# Altium PCB Chess Clock Touch Panel PCB.PcbDoc
Units mm, origin at the board's own origin, x right, y up, seen from the top; angles counter-clockwise.
Board outline 133 x 23 mm, 2 copper layers (Top Layer, Bottom Layer), stack 1.621 mm thick; 6 components, 10 nets, 29 pads, 5 vias.
Unrouted connection lines stored in the file: 10.
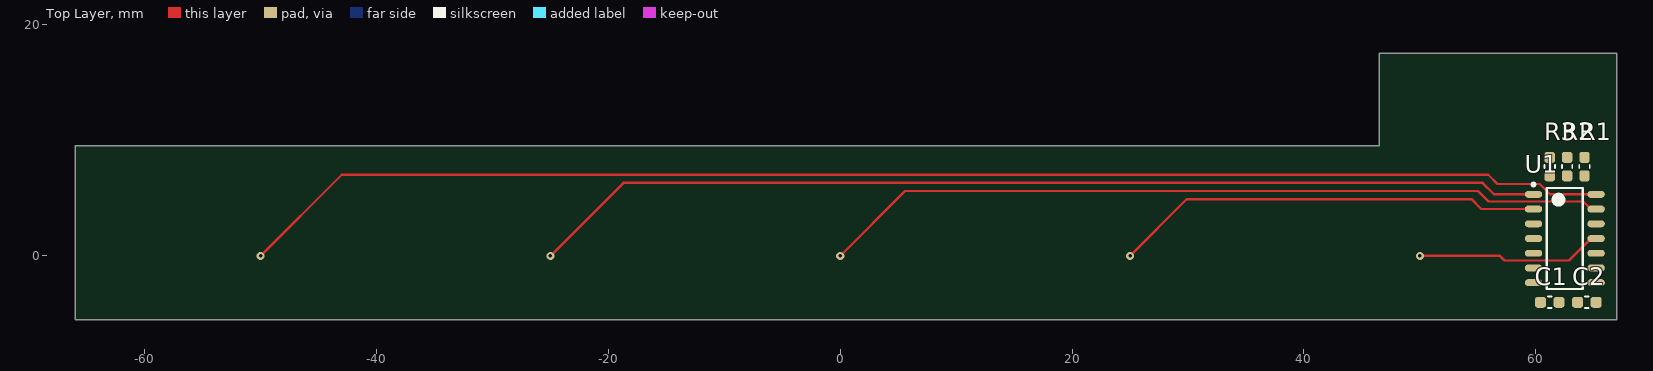
[diagram p0: Top Layer view]
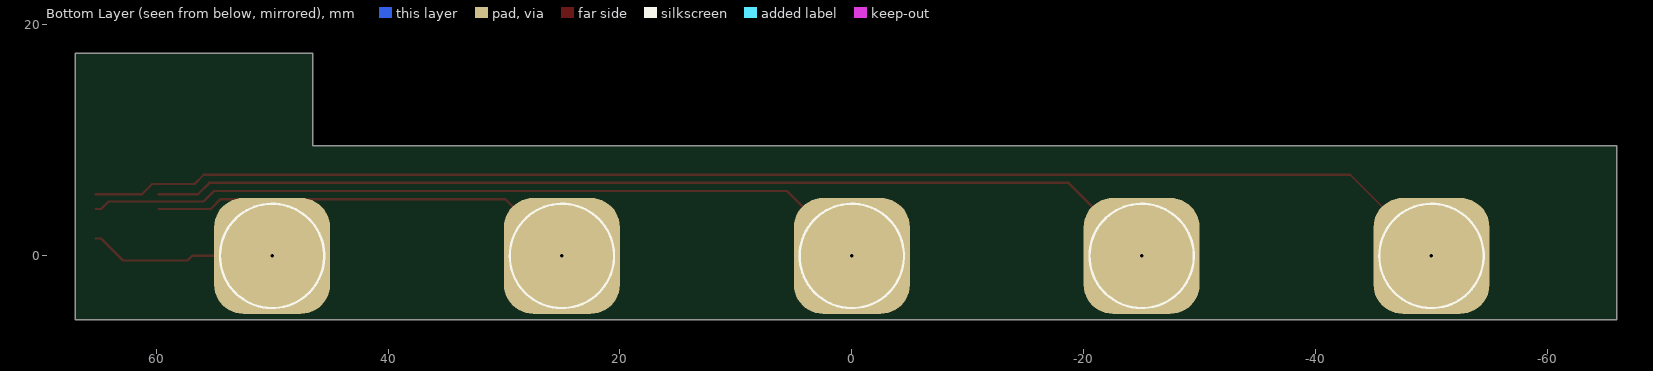
[diagram p1: Bottom Layer view, seen from below]

## Layer stack, top to bottom
Top Solder: solder mask 0.0102, Solder Resist, Dk 3.5
Top Layer: signal copper 0.0356
Dielectric 1: dielectric 1.55, FR-4, Dk 4.8
Bottom Layer: signal copper 0.0356
Bottom Solder: solder mask 0.0102, Solder Resist, Dk 3.5

## Board outline
-66,-5.5 67,-5.5 67,17.5 46.5,17.5 46.5,9.5 -66,9.5

## Design rules (kind name [scope] priority, off if disabled: settings)
BoardOutlineClearance [All] p1: gap=0.4 ignorepadtopadclearanceinfootprint=FALSE
Clearance [All] p1: gap=0.2 ignorepadtopadclearanceinfootprint=FALSE
ComponentClearance [All] p1: gap=0.1 collisioncheckmode=3 verticalgap=0.2 showdistances=TRUE
DiffPairsRouting [All] p1: maxlimit=100 minlimit=0.15 mostfreqgap=0.15 toplayer_minwidth=0.15 toplayer_maxwidth=10 toplayer_prefwidth=0.15 bottomlayer_minwidth=0.15 bottomlayer_maxwidth=10 bottomlayer_prefwidth=0.15 maxuncoupledlength=12.7
Height [All] p1: minheight=0 maxheight=100 prefheight=10
HoleSize [All] p1: absolutevalues=TRUE maxlimit=6.3 minlimit=0.3 maxpercent=80.000 minpercent=20.000
HoleToHoleClearance [All] p1: gap=0.5 allowstackedmicrovias=TRUE
MinimumAnnularRing [All] p1: minimumring=0.15
MinimumSolderMaskSliver [All] p1: minsoldermaskwidth=0.2
PlaneClearance [All] p1: clearance=0.102
PlaneConnect PlaneConnectPowerPads [InPadClass('PowerPads')] p1: planeconnectstyle=Direct reliefexpansion=0.508 reliefentries=4 reliefconductorwidth=0.254 reliefairgap=0.254
PlaneConnect [All] p2: pad.planeconnectstyle=Relief pad.reliefexpansion=0.3 pad.reliefentries=4 pad.reliefconductorwidth=0.102 pad.reliefairgap=0.102 via.planeconnectstyle=Direct via.reliefexpansion=0.3 via.reliefentries=4 via.reliefconductorwidth=0.127 via.reliefairgap=0.127
PolygonConnect PolygonConnectPowerPads [All vs (InPadClass('PowerPads'))] p1: connectstyle=Direct reliefconductorwidth=0.254 reliefentries=4 polygonreliefangle="90 Angle" airgapwidth=0.254
PolygonConnect [All] p2: thpad.connectstyle=Relief thpad.reliefconductorwidth=0.102 thpad.reliefentries=4 thpad.polygonreliefangle="90 Angle" thpad.airgapwidth=0.102 smdpad.connectstyle=Relief smdpad.reliefconductorwidth=0.102 smdpad.reliefentries=4 smdpad.polygonreliefangle="90 Angle" smdpad.airgapwidth=0.102 via.connectstyle=Direct via.reliefconductorwidth=0.127 via.reliefentries=4 via.polygonreliefangle="90 Angle" via.airgapwidth=0.127
RoutingCorners [All] p1: cornerstyle=45-Degree minsetback=2 maxsetback=2
RoutingVias [All] p1: holewidth=0.3 width=0.6 viastyle="Through Hole" minholewidth=0.3 minwidth=0.6 maxholewidth=6.3 maxwidth=10
SilkToSilkClearance [All] p1: silktosilkclearance=0
SilkToSolderMaskClearance [IsPad] p1: minsilkscreentomaskgap=0 clearancetoexposedcopper=TRUE
SolderMaskExpansion [All] p1: expansion=0.05 istentingtop=FALSE
Width [All] p1: maxlimit=50 minlimit=0.15 preferedwidth=0.2 minimp=50.000000 maximp=50.000000 favimp=50.000000
19 further rules are at their usual default settings.

## Components (designator, comment, footprint, x,y, rotation, side; value= is the part's Value field where it differs from the comment)
C1 "Val?" CAPC0603X08N 61.2,-4 r180 top
C2 "Val?" CAPC0603X08N 64.4,-4 r180 top
R1 "Val?" RESC0603X04N 64.2,7.7 r90 top
R2 "Val?" RESC0603X04N 62.7,7.7 r90 top
R3 "Val?" RESC0603X04N 61.2,7.7 r90 top
U1 "CAP1298-1-SL" CAP1298-1-SL 62.5,1.5 r0 top

## Footprints (in the part's own frame and the unit in brackets; to place one, negate y for a bottom-side part, rotate by r counter-clockwise, add the part's x,y. Pads: shape width x height; smd on the part's side, far side on the other; paste and mask are expansions set on the pad)
CAP1298-1-SL [mm] "SOIC, 14-Leads, Body 8.65x3.90mm, Pitch 1.27mm, IPC Medium Density"
  oval 1.5x0.6 smd: 1(-2.7,3.81) 2(-2.7,2.54) 3(-2.7,1.27) 4(-2.7,0) 5(-2.7,-1.27) 6(-2.7,-2.54) 7(-2.7,-3.81) 8(2.7,-3.81) 9(2.7,-2.54) 10(2.7,-1.27) 11(2.7,0) 12(2.7,1.27) 13(2.7,2.54) 14(2.7,3.81)
  silkscreen extent -2.82,-4.35 1.55,4.78, body extent -3,-4.35 3,4.35, height 1.75
CAPC0603X08N [mm] "Chip Capacitor, 2-Leads, Body 1.60x0.80mm, IPC Medium Density"
  rrect50% 0.95x0.95 smd: 1(-0.8,0) 2(0.8,0)
  silkscreen extent -0.15,-0.5 0.15,0.5, body extent -0.8,-0.41 0.8,0.41, height 0.84
RESC0603X04N [mm] "Chip Resistor, 2-Leads, Body 1.60x0.80mm, IPC Medium Density"
  rrect50% 0.95x0.9 smd: 1(-0.8,0) 2(0.8,0)
  silkscreen extent -0.15,-0.45 0.15,0.45, body extent -0.8,-0.4 0.8,0.4, height 0.46

## Part data
C1 C2: library part "GENERIC CAPC 0603", "GENERIC CAPC 0603", Manufacturer=-, Package=0603, Capacitance=Val?, Categories="Ceramic Capacitors", Manufacturer Part Number=-, Supplier 1=Digi-Key, Supplier 2=LCSC, Supplier Part Number 1=-, Supplier Part Number 2=-, Temperature Coefficient=-, Tolerance=-, Voltage - Rated=-
R1 R2 R3: library part "GENERIC RESC 0603", "GENERIC RESC 0603", Manufacturer=-, Package=0603, Categories=Resistors, Manufacturer Part Number=-, Power (Watts)=-, Resistance=Val?, Supplier 1=Digi-Key, Supplier Part Number 1=-, Temperature Coefficient=-, Tolerance=-
U1: "8-CHANNEL CAPACITIVE TOUCH SENSO", Manufacturer="Microchip Technology", Package=14-SOIC, Supplier Part Number 1=CAP1298-1-SL-ND, Categories="Interface ICs", Manufacturer Part Number=CAP1298-1-SL, Supplier 1=Digi-Key, Supplier 2=LCSC, Supplier Part Number 2=C1522287

## Free pads (board coordinates)
  rrect50% 10x10 smd far side: 0(-50,0) 0(-25,0) 0(0,0) 0(25,0) 0(50,0)

## Via types
v1: diameter 0.7, hole 0.3, Top Layer to Bottom Layer, tented both sides, 5 vias

## Nets (pads, with @x,y where several pads share a name; then routed paths per layer and width w, separated by ;. In a path a pad name is that pad's centre, name@x,y a point inside that pad or via, vN(x,y) a via of type N, cw(c..) or ccw(c..) an arc to the next point about the centre after c; other vN are vias at no path point)
ALERT: R3.1 U1.3
GND: C1.2 C2.2 U1.8
PAD1: pad.0@25,0 U1.2 | length 37.2
  Top Layer w0.2: v1(25,0) 29.9,4.9 54.44,4.9 55.3,4.04 U1.2
PAD2: pad.0@-25,0 U1.1 | length 87.8
  Top Layer w0.2: v1(-25,0) -18.7,6.3 55.41,6.3 56.4,5.31 U1.1
PAD3: pad.0@-50,0 U1.14 | length 118.8
  Top Layer w0.2: v1(-50,0) -43,7 55.9,7 56.7,6.2 60.338,6.2 61.228,5.31 U1.14
PAD4: pad.0@0,0 U1.13 | length 68.2
  Top Layer w0.2: v1(0,0) 5.6,5.6 55.01,5.6 55.91,4.7 64.09,4.7 64.75,4.04 U1.13
PAD5: pad.0@50,0 U1.11 | length 16.2
  Top Layer w0.2: v1(50,0) 56.9,0 57.3,-0.4 62.85,-0.4 64.75,1.5 U1.11
SMCLK: R1.1 U1.5
SMDAT: R2.1 U1.4
VCC: C1.1 C2.1 R1.2 R2.2 R3.2 U1.7
pads on no net: U1.6 U1.9 U1.10 U1.12

## Silkscreen, mask and mechanical layers (free items; w line width, h text height)
Bottom Overlay:
  circle w0.2: c50,0 r4.5
  circle w0.2: c25,0 r4.5
  circle w0.2: c0,0 r4.5
  circle w0.2: c-25,0 r4.5
  circle w0.2: c-50,0 r4.5
Mechanical 1:
  the board outline again, w0.8